# Altium PCB LXF1768.PcbDoc (part 1 of 5)
Units mil, origin at the board's own origin, x right, y up, seen from the top; angles counter-clockwise.
Board outline 3899 x 3079 mil, 2 copper layers (Top Layer, Bottom Layer); 52 components, 108 nets, 388 pads, 52 vias.
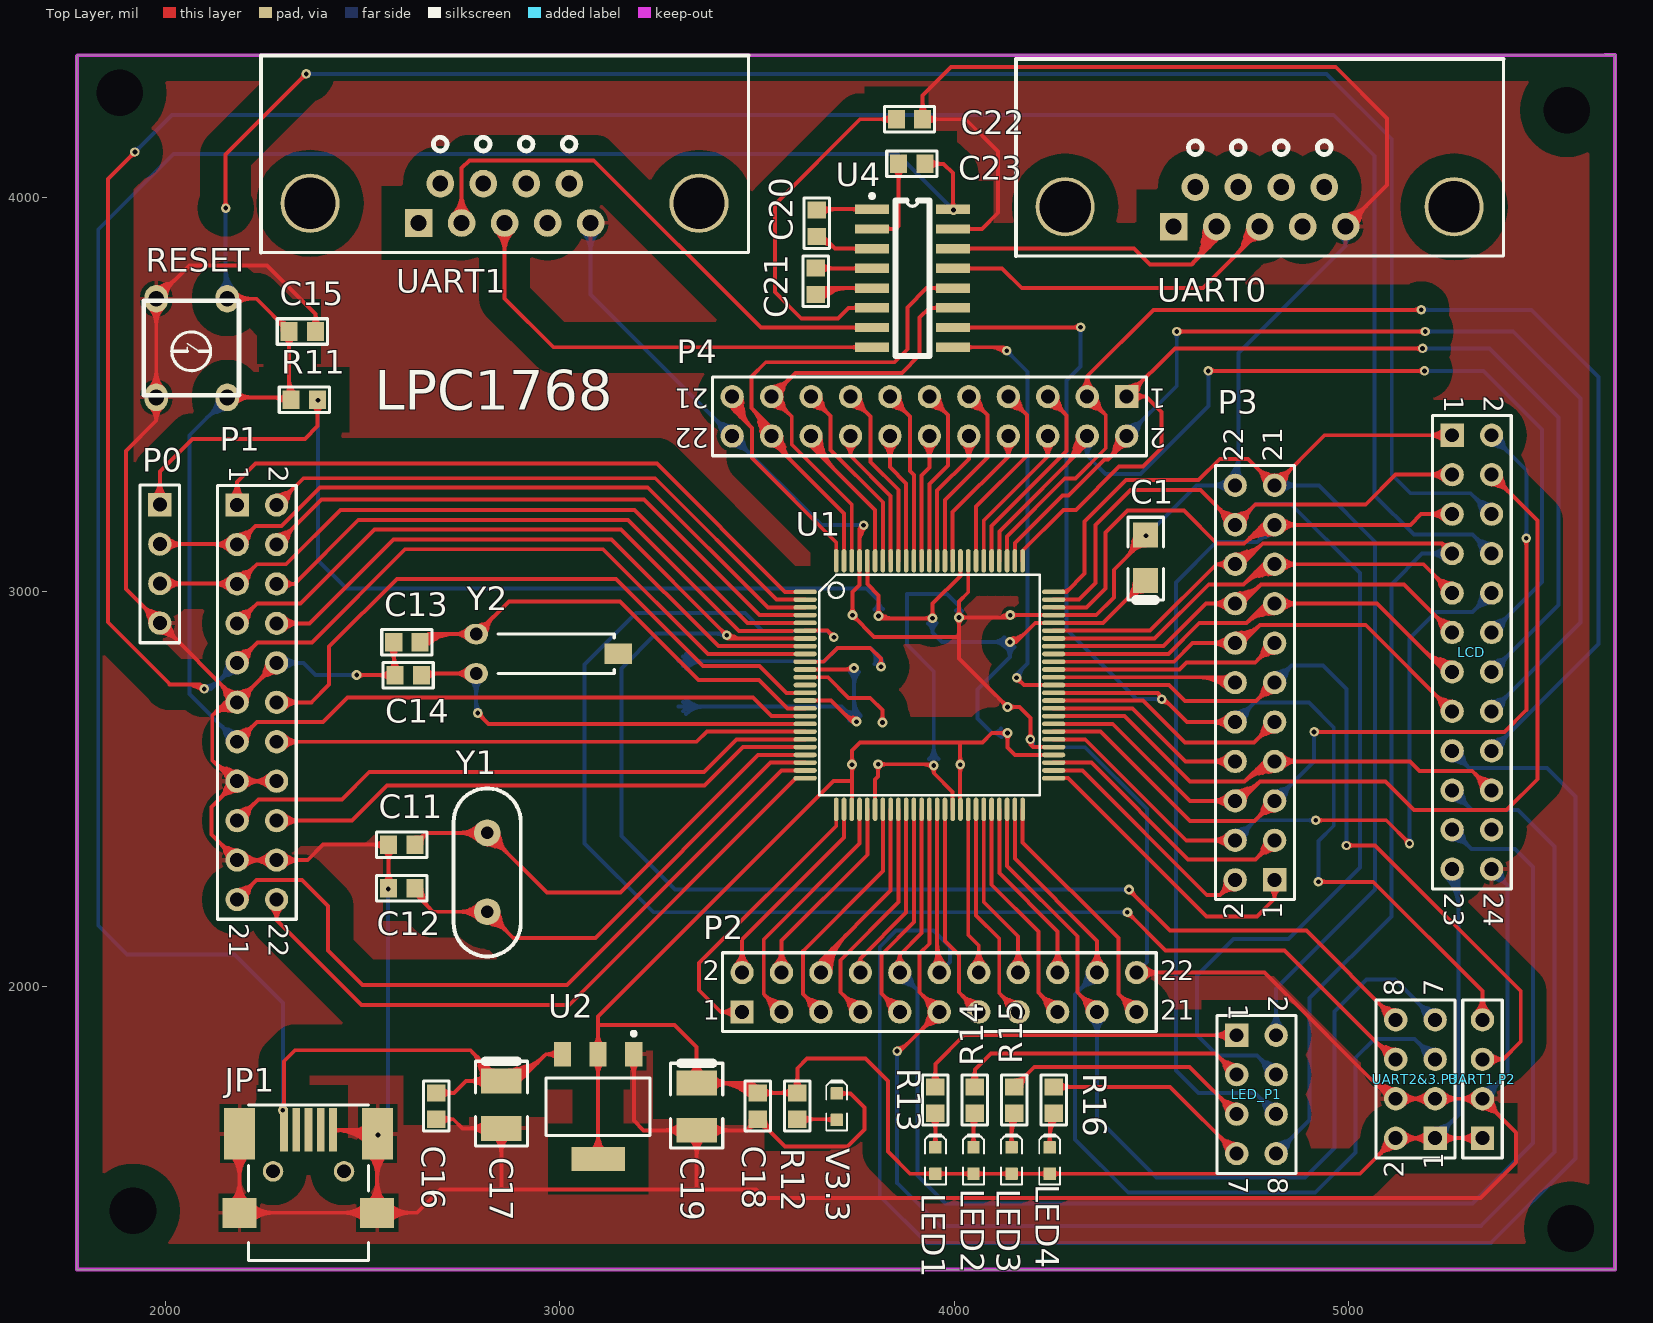
[diagram p0: Top Layer view]
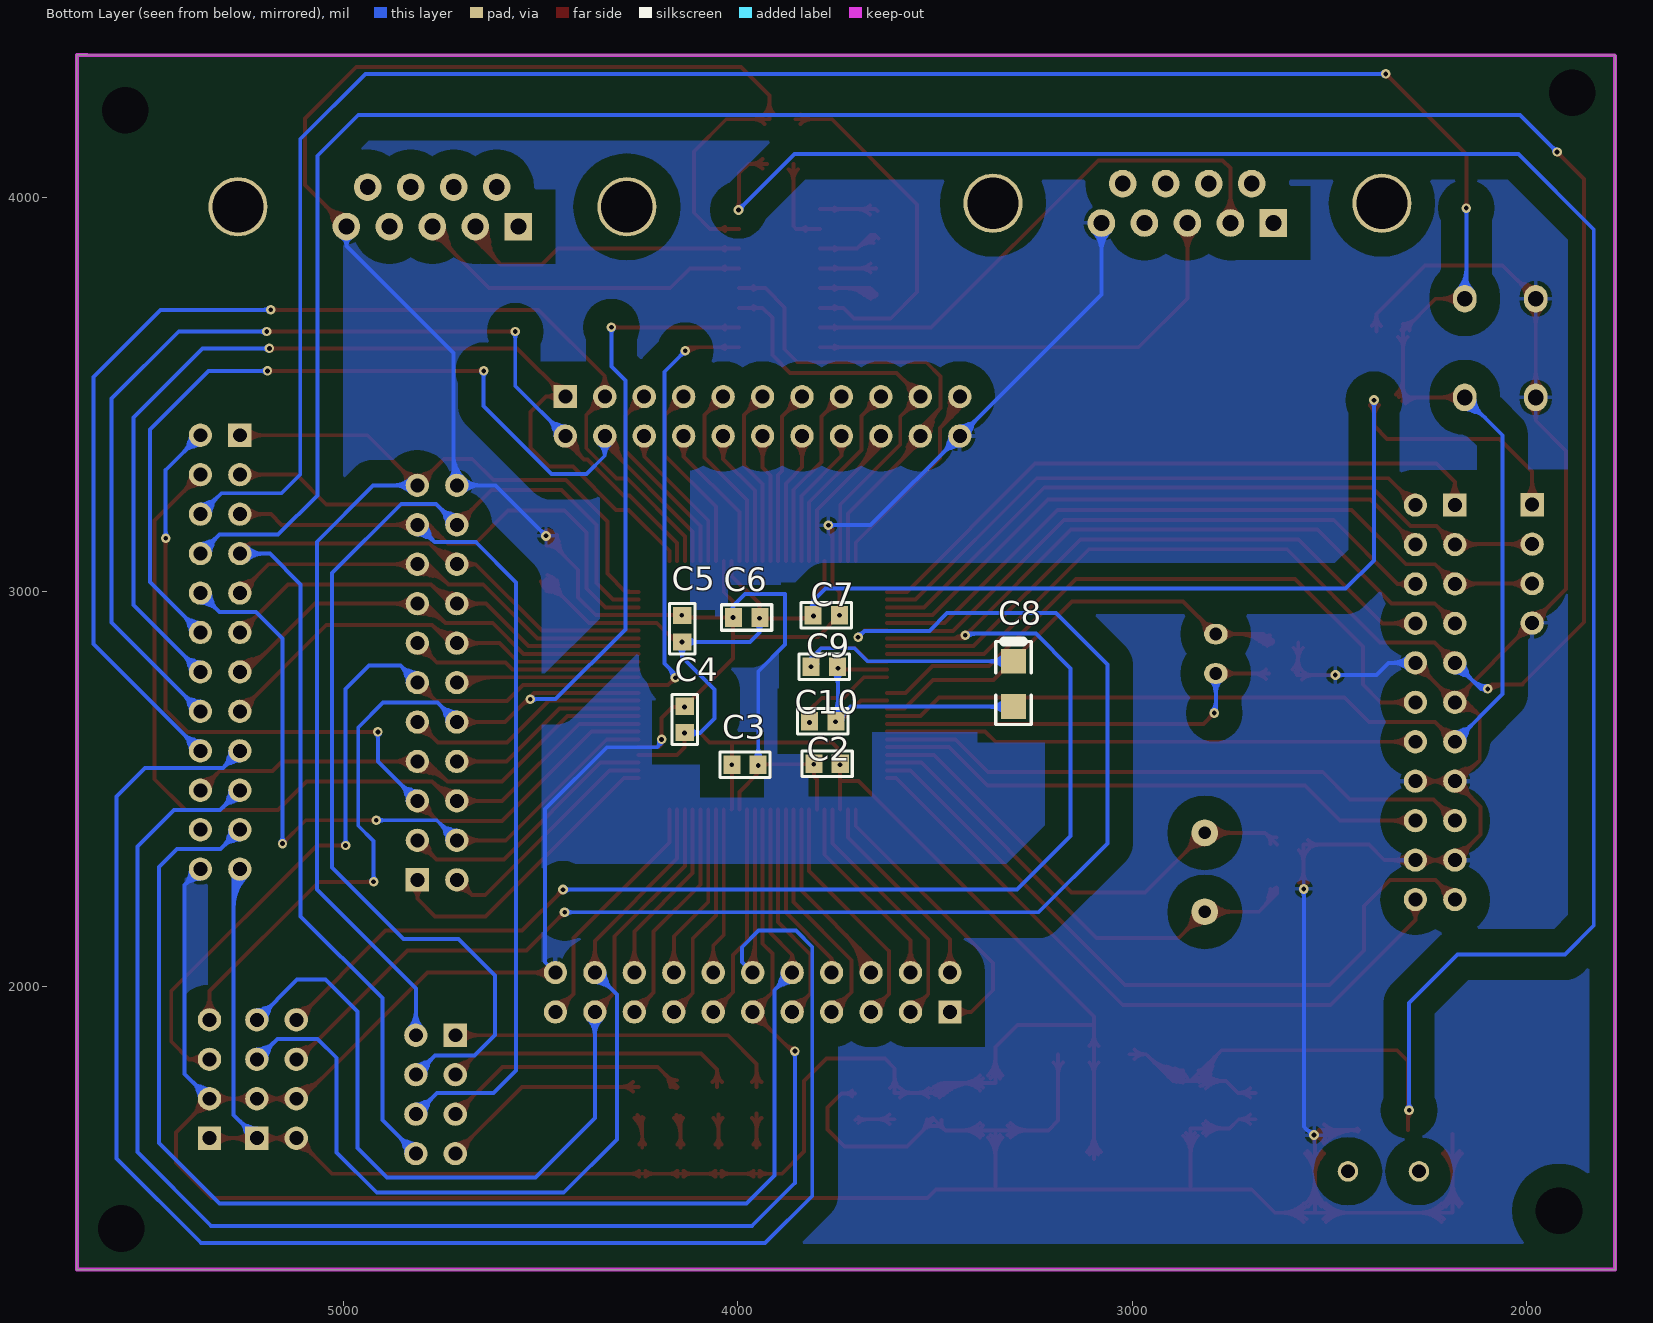
[diagram p1: Bottom Layer view, seen from below]

## Layer stack, top to bottom
Top Layer: signal copper 1.4
Dielectric: dielectric 12.6, FR-4, Dk 4.8
Bottom Layer: signal copper 1.4

## Board outline
1777,4360 1776,4359 1776,1282 5675,1282 5675,1319 5675,4361 5649,4361

## Design rules (kind name [scope] priority, off if disabled: settings)
Clearance [All] p1: gap=7
PolygonConnect [All] p1: connectstyle=Relief reliefconductorwidth=10 reliefentries=4 polygonreliefangle="90 Angle"
RoutingVias [All] p1: holewidth=28 width=50 viastyle="Through Hole" minholewidth=28 minwidth=50 maxholewidth=28 maxwidth=50
SilkscreenOverComponentPads [All] p1: minsilkscreentomaskgap=10
SolderMaskExpansion [All] p1: expansion=4
Width [All] p1: maxlimit=10 minlimit=10 preferedwidth=10
27 further rules are at their usual default settings.

## Components (designator, comment, footprint, x,y, rotation, side; value= is the part's Value field where it differs from the comment)
C1 "10uF/16V" CAP-A 4485,3029 r180 top
C2 "104" 0603 3740,2564 r0 bottom
C3 "104" 0603 4015,2562 r180 bottom
C4 "104" 0603 4134,2643 r90 bottom
C5 "104" 0603 4141,2873 r90 bottom
C6 "104" 0603 3944,2935 r0 bottom
C7 "104" 0603 3809,2941 r180 bottom
C8 "10uF/16V" CAP-A 3301,2824 r180 bottom
C9 "104" 0603 3814,2810 r180 bottom
C10 "104" 0603 3818,2672 r180 bottom
C11 "22pF" 0603 2566,2359 r0 top
C12 "22pF" 0603 2566,2249 r0 top
C13 "22pF" 0603 2579,2872 r0 top
C14 "22pF" 0603 2582,2789 r0 top
C15 "104" 0603 2314,3660 r0 top
C16 "104" 0603 2687,1730 r270 top
C17 "100uF/10V" CAP-B 2852,1760 r0 top
C18 "104" 0603 3502,1730 r270 top
C19 "100uF/10V" CAP-B 3347,1755 r0 top
C20 "104" 0603 3651,3901 r90 top
C21 "104" 0603 3649,3754 r90 top
C22 "104" 0603 3853,4198 r0 top
C23 "104" 0603 3859,4085 r0 top
JP1 "USB OTG" USB_MINIB_SMT 2301,1636 r90 top
LCD "Header 12X2" HDR2X12 5262,3397 r270 top
LED1 "PC2" LED_0603_BLUE 3951.98,1558.32 r90 top
LED2 "PC2" LED_0603_BLUE 4048.65,1558.32 r90 top
LED3 "PC2" LED_0603_BLUE 4145.31,1558.32 r90 top
LED4 "PC2" LED_0603_BLUE 4241.98,1558.32 r90 top
LED_P1 "Header 4X2" HDR2X4 4716,1876 r270 top
P0 "Header 4" HDR1X4 1986,3221 r270 top
P1 "Header 11X2" HDR2X11 2182,3220 r270 top
P2 "Header 11X2" HDR2X11 3462,1935 r0 top
P3 "Header 11X2" HDR2X11 4812,2270 r90 top
P4 "Header 11X2" HDR2X11 4437,3495 r180 top
R11 "4K7" 0603 2319,3487 r0 top
R12 "4.7K" 0603 3602,1730 r270 top
R13 "10K" 0603 3951.98,1678.32 r90 top
R14 "10K" 0603 4051.98,1678.32 r90 top
R15 "10K" 0603 4151.98,1678.32 r90 top
R16 "10K" 0603 4251.98,1678.32 r90 top
RESET "KEY" KEY-6A 2157,3493 r90 top (schematic designator RST1)
U1 "LPC1768" TQFP-100 3622,3000 r0 top
U2 "AMS1117-3.3" ZZ311 3097,1695 r180 top
U4 "MAX232" NSO16 3894,3795 r270 top
UART0 "UART0" DB-9RA/F 4556,3926 r0 top (schematic designator CON0)
UART1 "UART1" DB-9RA/F 2642,3935 r0 top (schematic designator CON1)
UART1.P2 "Header 4" HDR1X4 5339,1615 r90 top
UART2&3.P3 "Header 4X2" HDR2X4 5219,1615 r90 top
V3.3 "PC2" LED_0603_BLUE 3702,1695 r90 top (schematic designator VDD3.3)
Y1 "12MHz" XTAL-D 2816,2189 r90 top
Y2 "32.768KHz" CRY-32 2788,2793 r0 top

## Footprints (in the part's own frame and the unit in brackets; to place one, negate y for a bottom-side part, rotate by r counter-clockwise, add the part's x,y. Pads: shape width x height; smd on the part's side, far side on the other; paste and mask are expansions set on the pad)
0603 [mm]
  rect 1.1x1.2 smd: 1(0,0) 2(1.7,0)
  silkscreen extent -0.77,-0.82 2.47,0.82
CAP-A [mm]
  rect 1.6x1.6 smd: 1(0,0) 2(0,-2.921)
  silkscreen extent -1.14,-4.06 1.14,1.27
CAP-B [mm]
  rect 2.6x1.6 smd: 1(0,0) 2(0,-3.048)
  silkscreen extent -1.68,-4.19 1.68,1.27
CRY-32 [mil]
  rect 70x52 smd: 0(360,50)
  oval 60x52 hole 32: 1(0,0) 2(0,100)
  silkscreen extent 55,0 350,100
DB-9RA/F [mil]
  round 150 hole 130: 0(-275,50) 0(711,50)
  rect 70x70 hole 40: 1(0,0)
  round 70 hole 40: 2(109,0) 3(218,0) 4(327,0) 5(436,0) 6(55,100) 7(164,100) 8(273,100) 9(382,100)
  silkscreen extent -400,-75 836,425
HDR1X4 [mm] "Connector; Header; 4 Position"
  rect 1.5x1.5 hole 0.9: 1(0,0)
  round 1.5 hole 0.9: 2(2.54,0) 3(5.08,0) 4(7.62,0)
  silkscreen extent -1.27,-1.27 8.89,1.27
HDR2X4 [mm] "Connector; Header; 4x2 Position"
  rect 1.5x1.5 hole 0.9: 1(0,0)
  round 1.5 hole 0.9: 2(0,2.54) 3(2.54,0) 4(2.54,2.54) 5(5.08,0) 6(5.08,2.54) 7(7.62,0) 8(7.62,2.54)
  silkscreen extent -1.27,-1.27 8.89,3.81
HDR2X11 [mm] "Connector; Header; 11x2 Position"
  rect 1.5x1.5 hole 0.9: 1(0,0)
  round 1.5 hole 0.9: 2(0,2.54) 3(2.54,0) 4(2.54,2.54) 5(5.08,0) 6(5.08,2.54) 7(7.62,0) 8(7.62,2.54) 9(10.16,0) 10(10.16,2.54) 11(12.7,0) 12(12.7,2.54) 13(15.24,0) 14(15.24,2.54) 15(17.78,0) 16(17.78,2.54) 17(20.32,0) 18(20.32,2.54) 19(22.86,0) 20(22.86,2.54) 21(25.4,0) 22(25.4,2.54)
  silkscreen extent -1.27,-1.27 26.67,3.81
HDR2X12 [mm] "Connector; Header; 12x2 Position"
  rect 1.5x1.5 hole 0.9: 1(0,0)
  round 1.5 hole 0.9: 2(0,2.54) 3(2.54,0) 4(2.54,2.54) 5(5.08,0) 6(5.08,2.54) 7(7.62,0) 8(7.62,2.54) 9(10.16,0) 10(10.16,2.54) 11(12.7,0) 12(12.7,2.54) 13(15.24,0) 14(15.24,2.54) 15(17.78,0) 16(17.78,2.54) 17(20.32,0) 18(20.32,2.54) 19(22.86,0) 20(22.86,2.54) 21(25.4,0) 22(25.4,2.54) 23(27.94,0) 24(27.94,2.54)
  silkscreen extent -1.27,-1.27 29.21,3.81
KEY-6A [mil]
  oval 70x60 hole 40: 1(0,0) 1(250,0) 2(0,180) 2(250,180)
  silkscreen extent 5,-29 245,211
LED_0603_BLUE [mm] "Chip Capacitor, 2-Leads, Body 1.6x0.8mm, IPC Medium Density"
  round 0.254 on Mech14: 0(0,0)
  rrect10% 0.8x0.8 smd: 1(-0.85,0) 2(0.85,0)
  Top Layer pour cut-out: -0.5,0.5 0.5,0.5 0.5,-0.5 -0.5,-0.5
  silkscreen extent -1.55,-0.67 1.68,0.67, body extent -0.8,-0.4 0.8,0.4, height 0.75
NSO16 [mm]
  rect 0.6x2.2 smd: 1(-4.445,-2.6) 2(-3.175,-2.6) 3(-1.905,-2.6) 4(-0.635,-2.6) 5(0.635,-2.6) 6(1.905,-2.6) 7(3.175,-2.6) 8(4.445,-2.6) 9(4.445,2.6) 10(3.175,2.6) 11(1.905,2.6) 12(0.635,2.6) 13(-0.635,2.6) 14(-1.905,2.6) 15(-3.175,2.6) 16(-4.445,2.6)
  silkscreen extent -5.42,-2.72 5,1.1
TQFP-100 [mm]
  oval 1.5x0.3 smd: 1(0,0) 2(0,-0.5) 3(0,-1) 4(0,-1.5) 5(0,-2) 6(0,-2.5) 7(0,-3) 8(0,-3.5) 9(0,-4) 10(0,-4.5) 11(0,-5) 12(0,-5.5) 13(0,-6) 14(0,-6.5) 15(0,-7) 16(0,-7.5) 17(0,-8) 18(0,-8.5) 19(0,-9) 20(0,-9.5) 21(0,-10) 22(0,-10.5) 23(0,-11) 24(0,-11.5) 25(0,-12) 51(16,-12) 52(16,-11.5) 53(16,-11) 54(16,-10.5) 55(16,-10) 56(16,-9.5) 57(16,-9) 58(16,-8.5) 59(16,-8) 60(16,-7.5) 61(16,-7) 62(16,-6.5) 63(16,-6) 64(16,-5.5) 65(16,-5) 66(16,-4.5) 67(16,-4) 68(16,-3.5) 69(16,-3) 70(16,-2.5) 71(16,-2) 72(16,-1.5) 73(16,-1) 74(16,-0.5) 75(16,0)
  oval 0.3x1.5 smd: 26(2,-14) 27(2.5,-14) 28(3,-14) 29(3.5,-14) 30(4,-14) 31(4.5,-14) 32(5,-14) 33(5.5,-14) 34(6,-14) 35(6.5,-14) 36(7,-14) 37(7.5,-14) 38(8,-14) 39(8.5,-14) 40(9,-14) 41(9.5,-14) 42(10,-14) 43(10.5,-14) 44(11,-14) 45(11.5,-14) 46(12,-14) 47(12.5,-14) 48(13,-14) 49(13.5,-14) 50(14,-14) 76(14,2) 77(13.5,2) 78(13,2) 79(12.5,2) 80(12,2) 81(11.5,2) 82(11,2) 83(10.5,2) 84(10,2) 85(9.5,2) 86(9,2) 87(8.5,2) 88(8,2) 89(7.5,2) 90(7,2) 91(6.5,2) 92(6,2) 93(5.5,2) 94(5,2) 95(4.5,2) 96(4,2) 97(3.5,2) 98(3,2) 99(2.5,2) 100(2,2)
  silkscreen extent 0.9,-13.1 15.1,1.1
USB_MINIB_SMT [mil]
  round 52 hole 35: 0(-105,28) 0(-105,-152)
  rect 110x20 smd: 1(0,0) 2(0,-31) 3(0,-62) 4(0,-93) 5(0,-124)
  rect 130x79 smd: 6(-10,113) 7(-10,-237)
  rect 76x86 smd: 8(-210,113) 9(-210,-236)
  silkscreen extent -331,-214 63,90
XTAL-D [mil]
  round 68 hole 32: 1(0,0) 2(200,0)
  silkscreen extent -113,-85 313,85
ZZ311 [mm]
  rect 1.1x1.55 smd: 1(-2.3,-3.375) 2(0,-3.375) 3(2.3,-3.375)
  rect 3.45x1.55 smd: 4(0,3.375)
  silkscreen extent -3.35,-4.82 3.35,1.85

## Part data
C1 C8: library part "CAPACITOR POL", "Capacitor"
C2 C3 C4 C5 C6 C7 C9 C10 C11 C12 C13 C14 C15 C16 C18 C20 C21 C22 C23: library part CAP, "Capacitor"
C17 C19: library part "CAPACITOR POL_2", "Capacitor"
JP1: library part "USB MINI-AB"
LCD: "Header, 12-Pin, Dual row"
LED1 LED2 LED3 LED4 V3.3: library part LED0, "Typical INFRARED GaAs LED"
LED_P1 UART2&3.P3: "Header, 4-Pin, Dual row"
P0 UART1.P2: "Header, 4-Pin"
P1 P2 P3 P4: "Header, 11-Pin, Dual row"
R11 R12 R13 R14 R15 R16: library part RES1_2
RESET: library part SW-PB
U2: library part REG1117-5, "800mA and 1A Low Dropout Positive Regulator 2.85V, 3.3V, 5V, and Adjustable"
U4: library part MAX232ACSE, "+5V Powered, Multi-Channel RS-232 Driver/Receiver"
UART0 UART1: library part DB9
Y1: library part CRYSTAL, "Crystal"
Y2: library part CRYSTAL_1, "Crystal"

## Free pads (board coordinates)
  round 60 hole 118.11: 0(1884,4265) 1(1918,1431) 5(5553,4221) 6(5563,1386)
  round 10 smd: EndPad(2385.93,3487) EndPad(5262,2697) EndPad(5262,2897) EndPad(5262,3097) EndPad(5262,3297) EndPad(5362,2497) EndPad(5362,3297) StartPad(3741,2562) StartPad(3759.8,3078.74) StartPad(3925.93,4085) StartPad(5119,1815) StartPad(5119,1915)
  round 10 smd far side: EndPad(4992,3926)

## Via types
v1: diameter 25, hole 12, Top Layer to Bottom Layer, 27 vias
v2: diameter 24, hole 12, Top Layer to Bottom Layer, 25 vias

## Nets (pads, with @x,y where several pads share a name; then routed paths per layer and width w, separated by ;. In a path a pad name is that pad's centre, name@x,y a point inside that pad or via, vN(x,y) a via of type N, cw(c..) or ccw(c..) an arc to the next point about the centre after c; other vN are vias at no path point)
5V: C16.1 C17.1 C23.2 JP1.1 pad.StartPad@3925.93,4085 U2.3 U4.16 | length 8751.1
  Top Layer w10: JP1.1@2301,1636 2301,1810 2329,1838 2774,1838 ; C16.1@2687,1730 2732,1730 2762,1760 C17.1@2852,1760 ; 2790.68,1818.75 ccw(c2868.26,1838.82) C17.1@2835.01,1765.91 ; 2795.94,1798.45 ccw(c2857.06,1814.26) C17.1@2830.86,1756.81 ; C17.1@2801.19,1778.14 ccw(c2845.86,1789.69) C17.1@2826.71,1747.71 ; 2806.68,1795.48 ccw(c2847.11,1805.93) C17.1@2834.31,1766.18 ; C17.1@2859.66,1766.14 cw(c2903.63,1743.68) 2891.44,1791.53 ; C17.1@2868.56,1761.59 cw(c2929.87,1730.28) 2912.88,1796.99 ; C17.1@2877.47,1757.04 cw(c2956.12,1716.87) 2934.32,1802.45 ; C17.1@2877.73,1757.62 cw(c2923.14,1739.77) 2910.51,1786.9 ; C17.1@2887.89,1756.89 cw(c2911.35,1752.39) 2905.16,1775.47 ; U2.3@3006.45,1827.87 2964.87,1827.87 2897,1760 C17.1@2852,1760 ; pad.StartPad@3925.93,4085 3973,4085 3996.36,4061.64 U4.16@3996.36,3970 ; v1@2301,1693.07 cw(c2288.93,1693.07) 2297.46,1684.54 ccw(c2288.93,1693.07) v1@2301,1693.07 ; v1@2301,1693.07 ccw(c2313.07,1693.07) 2304.54,1684.54 cw(c2313.07,1693.07) v1@2301,1693.07 ; 2729.17,1730 cw(c2729.17,1770.21) 2700.74,1741.78 ccw(c2729.17,1770.21) 2729.17,1730 ; 2729.17,1730 ccw(c2729.17,1689.79) 2700.74,1718.22 cw(c2729.17,1689.79) 2729.17,1730 ; 2768.35,1760 cw(c2768.35,1696.03) 2813.58,1741.26 ccw(c2768.35,1696.03) 2768.35,1760 ; 2768.35,1760 ccw(c2768.35,1823.97) 2813.58,1778.74 cw(c2768.35,1823.97) 2768.35,1760 ; 2774,1838 cw(c2697.18,1761.17) 2805.82,1760.23 ccw(c2697.18,1761.17) 2774,1838 ; 2774,1838 C17.1@2852,1760 ; 2792.49,1760 cw(c2792.49,1720.18) 2820.65,1748.34 ccw(c2792.49,1720.18) 2792.49,1760 ; 2792.49,1760 ccw(c2792.49,1799.82) 2820.65,1771.66 cw(c2792.49,1799.82) 2792.49,1760 ; 2966.24,1827.87 cw(c2966.24,1787.67) 2994.67,1816.1 ccw(c2966.24,1787.67) 2966.24,1827.87 ; 2966.24,1827.87 ccw(c2966.24,1868.08) 2994.67,1839.65 cw(c2966.24,1868.08) 2966.24,1827.87 ; 3966.13,4085 cw(c3966.13,4125.21) 3937.7,4096.78 ccw(c3966.13,4125.21) 3966.13,4085 ; 3966.13,4085 ccw(c3966.13,4044.79) 3937.7,4073.22 cw(c3966.13,4044.79) 3966.13,4085 ; 3996.36,3986.44 cw(c3979.92,3986.44) 3991.55,3974.82 ccw(c3979.92,3986.44) 3996.36,3986.44 ; 3996.36,3986.44 ccw(c4012.81,3986.44) 4001.18,3974.82 cw(c4012.81,3986.44) 3996.36,3986.44 ; JP1.1@2292.7,1680.7 cw(c2272.65,1660.65) 2301,1660.65 ccw(c2272.65,1660.65) JP1.1@2292.7,1680.7 ; v1@2292.7,1691.3 ccw(c2272.65,1711.35) 2301,1711.35 cw(c2272.65,1711.35) v1@2292.7,1691.3 ; 2790.87,1821.13 cw(c2730.62,1760.88) 2815.82,1760.14 ccw(c2730.62,1760.88) 2790.87,1821.13 ; 2807.73,1804.27 cw(c2764.05,1760.59) 2825.82,1760.06 ccw(c2764.05,1760.59) 2807.73,1804.27 ; C17.1@2820.69,1791.31 ccw(c2832.31,1802.94) 2832.31,1786.5 cw(c2832.31,1802.94) C17.1@2820.69,1791.31 ; C17.1@2871.69,1756.5 ccw(c2871.69,1809.15) 2908.92,1771.92 cw(c2871.69,1809.15) C17.1@2871.69,1756.5 ; C17.1@2871.69,1766.5 ccw(c2871.69,1843.29) 2925.99,1788.99 cw(c2871.69,1843.29) C17.1@2871.69,1766.5 ; C17.1@2871.69,1776.5 ccw(c2871.69,1877.44) 2943.06,1806.06 cw(c2871.69,1877.44) C17.1@2871.69,1776.5 ; C17.1@2871.69,1786.5 ccw(c2871.69,1911.58) 2960.13,1823.13 cw(c2871.69,1911.58) C17.1@2871.69,1786.5 ; U4.16@3992.7,3973.3 ccw(c3983.85,3982.15) 3996.36,3982.15 cw(c3983.85,3982.15) U4.16@3992.7,3973.3 ; 3996.36,3990.06 ccw(c4020.06,3990.06) 4003.3,3973.3 cw(c4020.06,3990.06) 3996.36,3990.06
  Bottom Layer w10: v1(2298,1686) 2298,1958 2175,2081 1903,2081 1830,2154 1830,3919 2021,4110 3856,4110 v1(3998,3968) ; v1@3990.5,3968.06 ccw(c3972.88,3968.2) 3985.19,3980.81 ; v1@3990.5,3968.09 ccw(c3973.12,3968.29) 3985.56,3980.44 ccw(c3997.71,3992.88) v1@3997.91,3975.5 ; v1@3997.94,3975.5 cw(c3997.8,3993.12) 3985.19,3980.81 ; 2298,1704.11 cw(c2279.89,1704.11) 2292.7,1691.3 ccw(c2279.89,1704.11) 2298,1704.11 ; 2298,1704.11 ccw(c2316.11,1704.11) 2303.3,1691.3 cw(c2316.11,1704.11) 2298,1704.11 ; 3985.2,3980.8 cw(c3972.39,3968) 3990.5,3968 ccw(c3972.39,3968) 3985.2,3980.8 ; 3985.2,3980.8 ccw(c3998,3993.61) 3998,3975.5 cw(c3998,3993.61) 3985.2,3980.8
AGND: C8.2 C9.2 C10.2 U1.11 U1.15 | length 2121.2
  Top Layer w10: U1.15@3622,2724.41 3687.59,2724.41 3741,2671 v1(3752,2671) ; U1.11@3622,2803.15 3743.85,2803.15 v1@3745,2802 ; 3742.81,2680.96 cw(c3737.97,2662.9) v1@3754.17,2672.25 ; 3719.81,2803.15 ccw(c3719.81,2832.69) 3740.7,2811.8 cw(c3719.81,2832.69) 3719.81,2803.15 ; 3720.42,2691.58 ccw(c3752,2723.16) 3752,2678.5 cw(c3752,2723.16) 3720.42,2691.58 ; 3737.49,2674.51 ccw(c3752,2689.02) 3752,2668.5 cw(c3752,2689.02) 3737.49,2674.51
  Bottom Layer w10: C8.2@3301,2709 3714,2709 C10.2@3746,2677 ; C10.2@3734.36,2695.1 cw(c3727.11,2668.01) C10.2@3754.32,2674.78 ; C10.2@3744.5,2671.06 ccw(c3726.88,2671.2) C10.2@3739.19,2683.81 ; C10.2@3744.5,2671.09 ccw(c3727.12,2671.29) 3739.56,2683.44 ccw(c3751.71,2695.88) C10.2@3751.91,2678.5 ; v1(3746,2806.5) C10.2@3746,2677 ; C10.2@3747.13,2676.7 ccw(c3740.28,2684.71) C10.2@3749.41,2689.98 ; C10.2@3748.46,2685.36 cw(c3742.2,2681.9) C10.2@3746.99,2676.58 ; C10.2@3751.94,2678.5 cw(c3751.8,2696.12) C10.2@3739.19,2683.81 ; v1(3752,2671) C10.2@3746,2677 ; 3340.82,2709 cw(c3340.82,2748.82) 3312.66,2720.66 ccw(c3340.82,2748.82) 3340.82,2709 ; 3340.82,2709 ccw(c3340.82,2669.18) 3312.66,2697.34 cw(c3340.82,2669.18) 3340.82,2709 ; 3364.97,2709 cw(c3364.97,2772.97) 3319.74,2727.74 ccw(c3364.97,2772.97) 3364.97,2709 ; 3364.97,2709 ccw(c3364.97,2645.03) 3319.74,2690.26 cw(c3364.97,2645.03) 3364.97,2709 ; C10.2@3739.2,2683.8 cw(c3726.39,2671) 3744.5,2671 ccw(c3726.39,2671) C10.2@3739.2,2683.8 ; C10.2@3739.2,2683.8 ccw(c3752,2696.61) 3752,2678.5 cw(c3752,2696.61) C10.2@3739.2,2683.8 ; C9.2@3746,2788.39 cw(c3764.11,2788.39) 3751.3,2801.2 ccw(c3764.11,2788.39) C9.2@3746,2788.39 ; C9.2@3746,2788.39 ccw(c3727.89,2788.39) 3740.7,2801.2 cw(c3727.89,2788.39) C9.2@3746,2788.39 ; C10.2@3747.01,2676.6 ccw(c3739.83,2684.68) C10.2@3749.19,2690.08 ; C10.2@3747.01,2676.6 ccw(c3739.83,2684.68) C10.2@3749.19,2690.08 ; C10.2@3747.01,2676.6 ccw(c3739.83,2684.68) C10.2@3749.19,2690.08 ; 3719.16,2703.84 ccw(c3751.07,2735.75) 3751.07,2690.62 cw(c3751.07,2735.75) 3719.16,2703.84 ; 3724.08,2698.92 cw(c3699.14,2673.97) 3734.42,2673.97 ccw(c3699.14,2673.97) 3724.08,2698.92 ; C9.2@3735.3,2796.26 cw(c3709.45,2770.41) 3746,2770.41 ccw(c3709.45,2770.41) C9.2@3735.3,2796.26 ; C10.2@3739.3,2685.74 ccw(c3723.11,2701.93) 3746,2701.93 cw(c3723.11,2701.93) C10.2@3739.3,2685.74 ; 3746,2702.27 ccw(c3779.38,2702.27) 3755.78,2678.67 cw(c3779.38,2702.27) 3746,2702.27 ; 3746,2703.59 ccw(c3784.59,2703.59) 3757.3,2676.3 cw(c3784.59,2703.59) 3746,2703.59 ; 3746,2726.42 ccw(c3803.52,2726.42) 3762.85,2685.74 cw(c3803.52,2726.42) 3746,2726.42 ; 3746,2765.24 cw(c3789.86,2765.24) 3758.85,2796.26 ccw(c3789.86,2765.24) 3746,2765.24